# EAGLE board board2 (EAGLE 6.1)
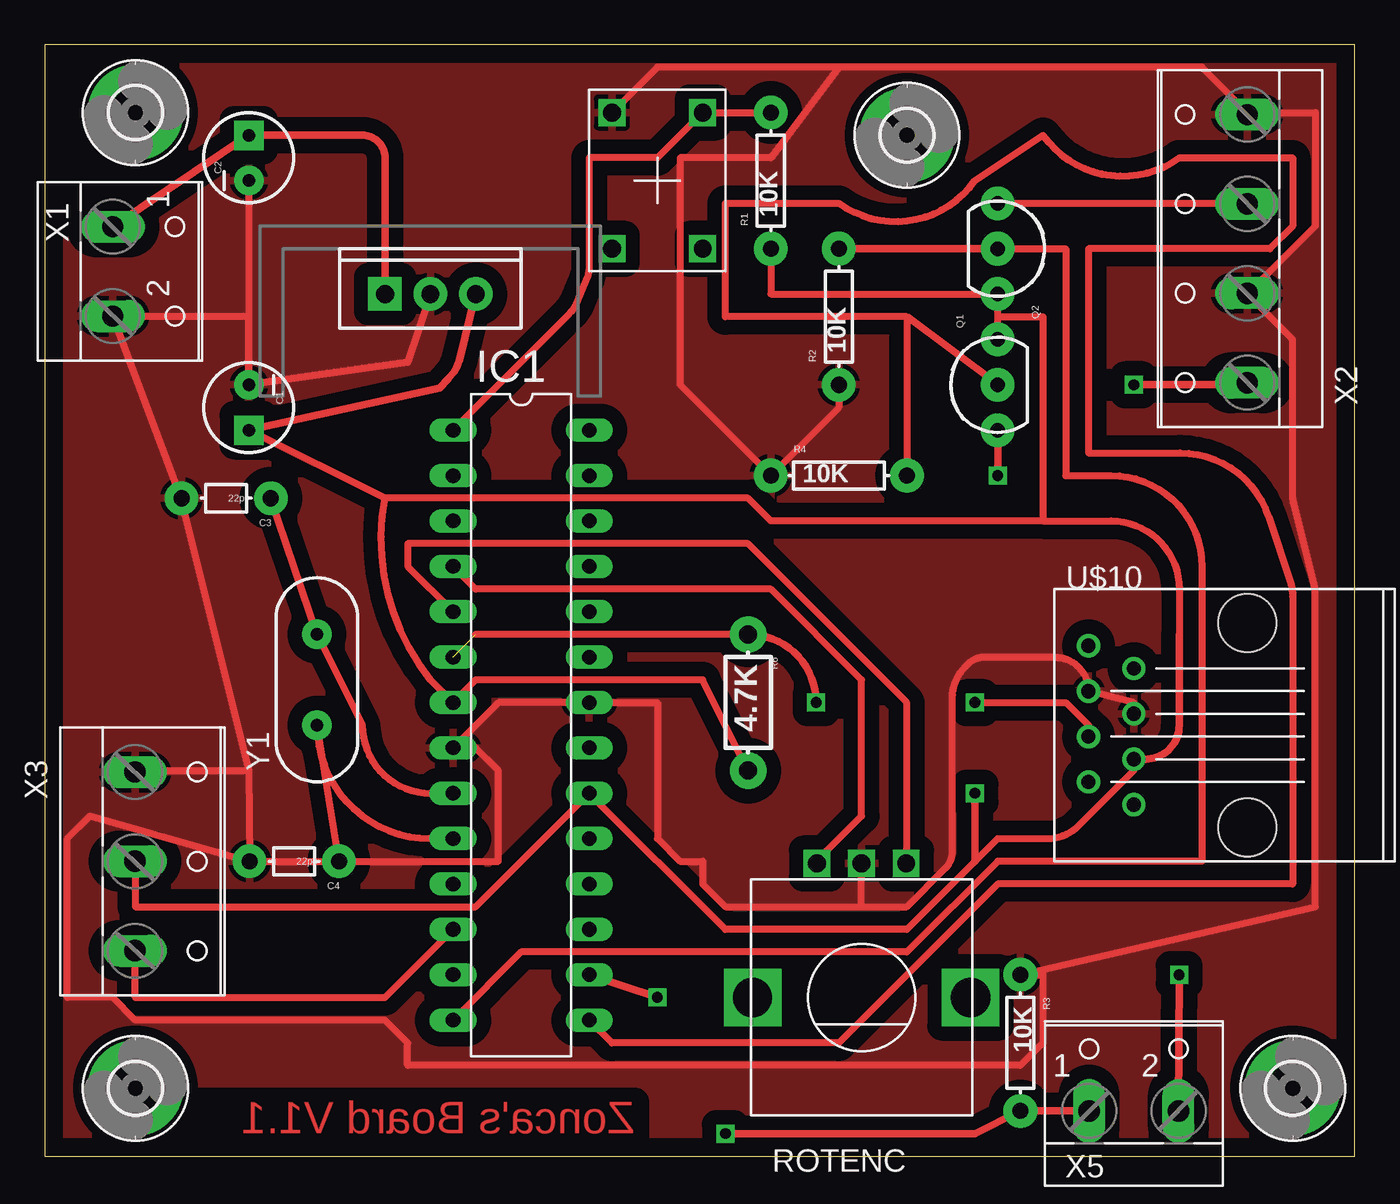
[diagram p0: board, top side]
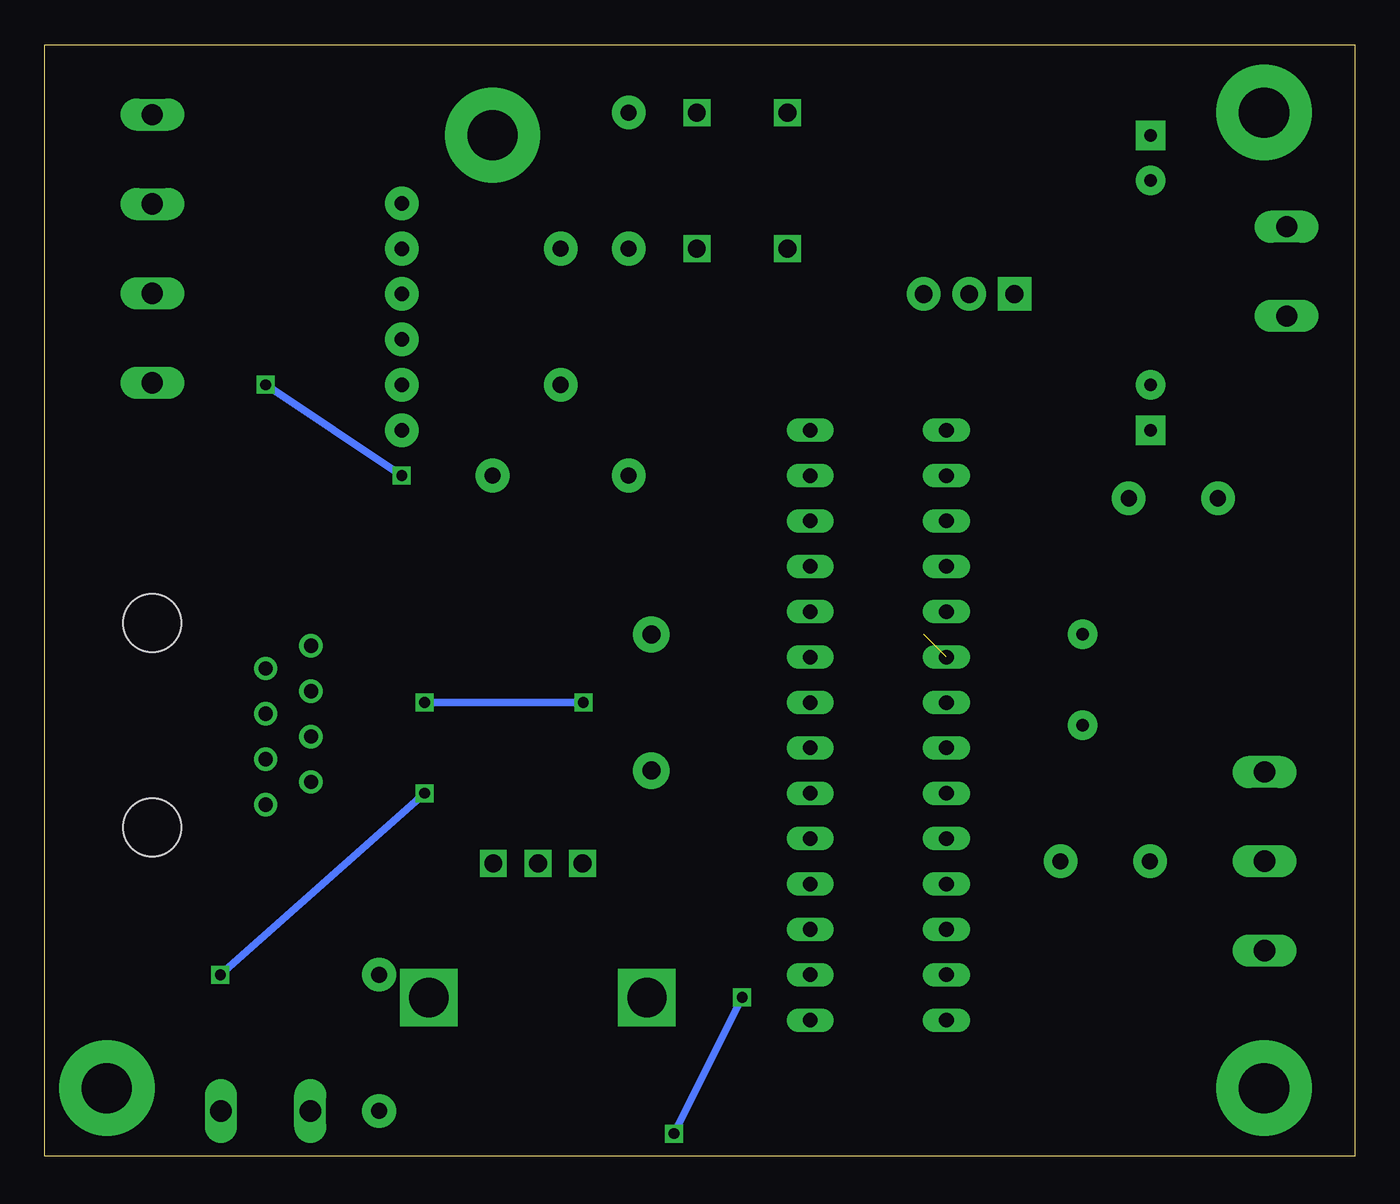
[diagram p1: board, bottom side, seen from below]

Size 73.33 x 62.22 mm. Coordinates in mm from the lower left corner, seen from the top.
Outline: 0,0 73.33,0 73.33,62.22 0,62.22 0,0
Copper layers (1*16): Top 0.035mm / dielectric 1.5mm / Bottom 0.035mm
Design rules: minimum track width 15mil, minimum drill 24mil, track to track 10mil, track to pad 10mil, pad to pad 10mil, via to via 10mil, smd to smd 8mil, copper to edge 40mil, drill to drill 8mil, minimum pad ring 10mil, minimum via ring 8mil, stop-mask expansion 4mil, vias tented up to drill 0mil, thermal gap 10mil

## Footprints (pad centres in the part's own frame; a part is rotated, then mirrored left to right if it is on the bottom)
CPOL-RADIAL-10UF-25V = drill 0.7 pad 1.651 square: 1 1.27,0 | drill 0.7 pad 1.651: 2 -1.27,0
AXIAL-5MM = drill 0.9 pad 1.88: P$1 -2.5,0; P$2 2.5,0
2,8-PAD = drill 2.8 pad 5.334: B2,8 0,0
DIL28-3 = drill 0.813 long: 1 -16.51,-3.81; 2 -13.97,-3.81; 3 -11.43,-3.81; 4 -8.89,-3.81; 5 -6.35,-3.81; 6 -3.81,-3.81; 7 -1.27,-3.81; 8 1.27,-3.81; 9 3.81,-3.81; 10 6.35,-3.81; 11 8.89,-3.81; 12 11.43,-3.81; 13 13.97,-3.81; 14 16.51,-3.81; 15 16.51,3.81; 16 13.97,3.81; 17 11.43,3.81; 18 8.89,3.81; 19 6.35,3.81; 20 3.81,3.81; 21 1.27,3.81; 22 -1.27,3.81; 23 -3.81,3.81; 24 -6.35,3.81; 25 -8.89,3.81; 26 -11.43,3.81; 27 -13.97,3.81; 28 -16.51,3.81
TO-92-AMMO = drill 0.813 pad 1.88: 1 -2.54,0; 2 0,0; 3 2.54,0
AXIAL-0.3 = drill 0.9 pad 1.88: P$1 -3.81,0; P$2 3.81,0
AXIAL-0.3-KIT = drill 1.016 pad 2.032: P$1 -3.81,0; P$2 3.81,0
KSA_SEALED_TAC_SWITCH = drill 1 square: P$1 -3.81,2.54; P$2 3.81,2.54; P$3 -3.81,-2.54; P$4 3.81,-2.54
ALPS_EC12E_SW = drill 1 square: A -2.5,-7.5; B 2.5,-7.5; C 0,-7.5 | drill 2.2 square: GND1 -6.1,0; GND2 6.1,0
RJ45 = drill 0.8: 1 -6.35,-4.445; 2 -8.89,-3.175; 3 -6.35,-1.905; 4 -8.89,-0.635; 5 -6.35,0.635; 6 -8.89,1.905; 7 -6.35,3.175; 8 -8.89,4.445 | hole 3.25: 0,-5.715; 0,5.715
TO220-IGO = drill 1 pad 1.88: GND 0,0; OUT 2.54,0 | drill 1 pad 1.88 square: IN -2.54,0
W237-102 = drill 1.194 long: 1 -2.5,-1.27; 2 2.5,-1.27
W237-4 = drill 1.194 long: 1 -7.5,-1.27; 2 -2.5,-1.27; 3 2.5,-1.27; 4 7.5,-1.27
W237-103 = drill 1.194 long: 1 -5,-1.29; 2 0,-1.29; 3 5,-1.29
HC49US = drill 0.7 pad 1.651: 1 -2.54,0; 2 2.54,0

## Placement (x,y rotation side)
C1  10uf  [CPOL-RADIAL-10UF-25V]  11.43,41.91 270 top
C2  10uf  [CPOL-RADIAL-10UF-25V]  11.43,55.88 90 top
C3  22p  [AXIAL-5MM]  10.16,36.83 180 top
C4  22p  [AXIAL-5MM]  13.97,16.51 180 top
E$1  [2,8-PAD]  5.08,58.42 0 top
E$2  [2,8-PAD]  5.08,3.81 0 top
E$3  [2,8-PAD]  69.85,3.81 0 top
E$4  [2,8-PAD]  48.26,57.15 0 top
IC1  MEGA8-P  [DIL28-3]  26.67,24.13 270 top
Q1  2n3904  [TO-92-AMMO]  53.34,43.18 90 top
Q2  2n3904  [TO-92-AMMO]  53.34,50.8 270 top
R1  10K  [AXIAL-0.3]  40.64,54.61 90 top
R2  10K  [AXIAL-0.3]  44.45,46.99 90 top
R3  10K  [AXIAL-0.3]  54.61,6.35 270 top
R4  10K  [AXIAL-0.3]  44.45,38.1 0 top
R6  4.7K  [AXIAL-0.3-KIT]  39.37,25.4 270 top
RESETSWITCH  [KSA_SEALED_TAC_SWITCH]  34.29,54.61 90 top
ROTENC  EC12E_SW  [ALPS_EC12E_SW]  45.72,8.89 180 top
U$10  RJ45  [RJ45]  67.31,24.13 0 top
VREG  5V  [TO220-IGO]  21.59,48.26 0 top
X1  [W237-102]  5.08,49.53 270 top
X2  [W237-4]  66.04,50.8 90 top
X3  [W237-103]  6.35,16.51 270 top
X5  [W237-102]  60.96,3.81 0 top
Y1  16mhz  [HC49US]  15.24,26.67 90 top

## Library data of the parts
C1-C4 Q1 Q2 R1-R4 R6 RESETSWITCH VREG Y1 = SparkFun
E$1-E$4 = holes
IC1 = atmel; OC_FARNELL: unknown; OC_NEWARK: unknown
ROTENC = Rotary Encoder Fixed; MPN: EC12E2424407; OC_FARNELL: 1520813; OC_NEWARK: 74M1068
U$10 = con-rj
X1 X5 = con-wago-500; MPN: 237-102; OC_FARNELL: unknown; OC_NEWARK: 70K9898
X2 = con-wago-500; OC_FARNELL: unknown; OC_NEWARK: unknown
X3 = con-wago-500; MPN: 237-103; OC_FARNELL: unknown; OC_NEWARK: 18M7116

## Nets
5V: C1.1 IC1.7 IC1.20 Q1.3 Q2.3 R1.P$1 R6.P$2 U$10.3 VREG.OUT X3.2 X5.2
DALLASONEWIREBUS: IC1.6 R6.P$1 U$10.4
GND: C1.2 C2.2 C3.P$2 C4.P$2 IC1.8 IC1.22 R2.P$1 R3.P$1 R4.P$1 RESETSWITCH.P$2 ROTENC.C U$10.5 U$10.6 VREG.GND X1.2 X2.2 X2.4 X3.1
MENUBUTTON: IC1.16 R3.P$2 X5.1
N$1: IC1.1 R1.P$2 RESETSWITCH.P$4
N$3: C3.P$1 IC1.9 Y1.2
N$4: C4.P$1 IC1.10 Y1.1
N$14: IC1.15 Q1.2 R4.P$2
N$26: IC1.21
N$28: Q2.1 X2.3
N$30: Q1.1 X2.1
N$31: IC1.14 Q2.2 R2.P$2
ROTARYENCA: IC1.4 ROTENC.B
ROTARYENCB: IC1.5 ROTENC.A
SERLCDOUT: IC1.12 X3.3
UNREGDCIN: C2.1 VREG.IN X1.1

## Tracks (layer width: path | path; a pad name or v marks a point on that pad's centre or on a via)
5V  (via drill 0.6)
  Top 0.381: R6.P$2 36.83,26.67 24.13,26.67 IC1.7 21.59,26.67 arc-49 19.05,36.83 39.37,36.83 40.64,35.56 55.88,35.56 | X3.2 5.08,16.51 5.08,13.97 24.13,13.97 IC1.20 38.1,12.7 48.26,12.7 52.07,16.51 53.34,17.78 56.1,17.78 arc45 57.89,18.52 60.96,21.59 U$10.3 | R1.P$1 40.64,48.26 Q2.3 Q1.3 53.34,46.99 55.88,46.99 55.88,35.56 | 55.88,35.56 59.69,35.56 arc-90 63.5,31.75 63.5,29.21
  Top 0.406: VREG.OUT 23.21,44.59 23.19,44.51 23.15,44.38 23.05,44.14 22.93,43.94 22.59,43.49 22.09,43.01 C1.1 19.05,36.83 | X5.2 v63.5,10.16 | v52.07,20.32 52.07,16.51 | U$10.3 61.59,22.23 arc90 63.5,24.13 63.5,29.21
  Bottom 0.406: v63.5,10.16 v52.07,20.32
DALLASONEWIREBUS  (via drill 0.6)  (1 unrouted)
  Top 0.381: R6.P$1 24.13,29.21 | v52.07,25.4 57.15,25.4 58.42,24.13 U$10.4
  Top 0.406: R6.P$1 arc-90 v43.18,25.4
  Bottom 0.406: v43.18,25.4 v52.07,25.4
GND
  Top 0.381: R2.P$1 44.45,41.91 R4.P$1 35.56,43.18 35.56,55.88 40.64,55.88 44.45,60.96 | RESETSWITCH.P$2 34.29,60.96 44.45,60.96 | 44.45,60.96 64.77,60.96 67.31,58.42 | 67.31,48.26 71.12,52.07 71.12,58.42 67.31,58.42 | 67.31,58.42 X2.4 | 7.62,36.83 11.43,21.59 | 11.43,21.59 5.08,21.59 X3.1 | 11.43,21.59 C4.P$2 | VREG.GND 20.32,44.45 | C2.2 11.43,46.99 | 7.62,36.83 3.81,46.99 11.43,46.99 | 7.62,36.83 C3.P$2 | 11.43,46.99 X1.2 | 67.31,48.26 69.85,45.72 69.85,37.18 arc14 69.94,36.49 71.12,31.75 71.12,13.97 R3.P$1 55.88,10.16 55.88,6.35 54.61,5.08 20.32,5.08 20.32,6.35 19.05,7.62 5.08,7.62 3.81,8.89 1.27,8.89 1.27,17.78 2.54,19.05 C4.P$2 | 67.31,48.26 X2.2 | 45.72,13.97 ROTENC.C 45.72,16.51 | 45.72,13.97 38.1,13.97 36.83,15.24 36.83,16.51 35.56,16.51 34.29,17.78 34.29,25.4 IC1.22 25.4,25.4 IC1.8 24.13,22.86 25.4,21.59 25.4,16.51 C4.P$2 | 45.72,13.97 48.26,13.97 50.43,16.14 arc45 50.8,17.04 50.8,25.62 arc-45 51.54,27.41 51.7,27.57 arc-45 52.6,27.94 56.52,27.94 arc-90 U$10.6 60.96,25.4 U$10.5
  Top 0.406: 11.43,46.99 C1.2 20.32,44.45
  pour Top (isolate 0.813): -2.54,64.77 73.66,64.77 arc-90 76.2,62.23 76.2,-5.08 0,-5.08 arc-90 -2.54,-2.54
MENUBUTTON  (via drill 0.6)
  Top 0.381: 58.42,2.54 X5.1
  Top 0.406: IC1.16 v34.29,8.89 | v38.1,1.27 52.07,1.27 R3.P$2 58.42,2.54
  Bottom 0.406: v34.29,8.89 v38.1,1.27
N$1
  Top 0.381: IC1.1 29.25,47.03 29.5,47.31 29.54,47.35 29.74,47.66 30.38,49.2 30.48,49.69 30.48,55.88 34.29,55.88 RESETSWITCH.P$4 R1.P$2
N$3
  Top 0.381: IC1.9 21.59,20.32 arc-90 17.78,24.13 Y1.2 C3.P$1
N$4
  Top 0.381: IC1.10 21.59,17.78 arc-90 Y1.1 C4.P$1
N$14
  Top 0.381: IC1.15 31.75,6.35 44.45,6.35 53.34,15.24 69.85,15.24 69.85,31.34 arc18 69.72,32.14 68.5,35.79 arc72 63.54,39.37 58.42,39.37 58.42,50.8 68.58,50.8 69.85,52.07 69.85,55.88 63.5,55.88 arc-90 55.88,57.15 52.07,54.61 arc-90 44.45,53.34 38.1,53.34 38.1,46.99 48.26,46.99 | Q1.2 48.26,46.99 | 48.26,46.99 R4.P$2
N$28
  Top 0.381: Q2.1 67.31,53.34 X2.3
N$30  (via drill 0.6)
  Top 0.381: 67.31,43.18 X2.1
  Top 0.406: Q1.1 v53.34,38.1 | v60.96,43.18 67.31,43.18
  Bottom 0.406: v53.34,38.1 v60.96,43.18
N$31
  Top 0.381: IC1.14 26.67,11.43 48.26,11.43 53.34,16.51 64.77,16.51 64.77,33.02 arc90 59.69,38.1 57.15,38.1 57.15,50.8 Q2.2
  Top 0.406: R2.P$2 Q2.2
ROTARYENCA
  Top 0.381: IC1.4 24.13,31.75 40.64,31.75 45.72,26.67 45.72,19.05 43.18,16.51 ROTENC.B
ROTARYENCB
  Top 0.381: IC1.5 20.32,33.02 20.32,34.29 39.37,34.29 48.26,25.4 48.26,16.51 ROTENC.A
SERLCDOUT
  Top 0.381: IC1.12 19.05,8.89 5.08,8.89 X3.3
UNREGDCIN
  Top 0.406: X1.1 C2.1 17.78,57.15 arc-90 19.05,55.88 VREG.IN

## Text on the board
Top: Zonca's Board V1.1